# EAGLE board Dash_PCB (EAGLE 8.7.0)
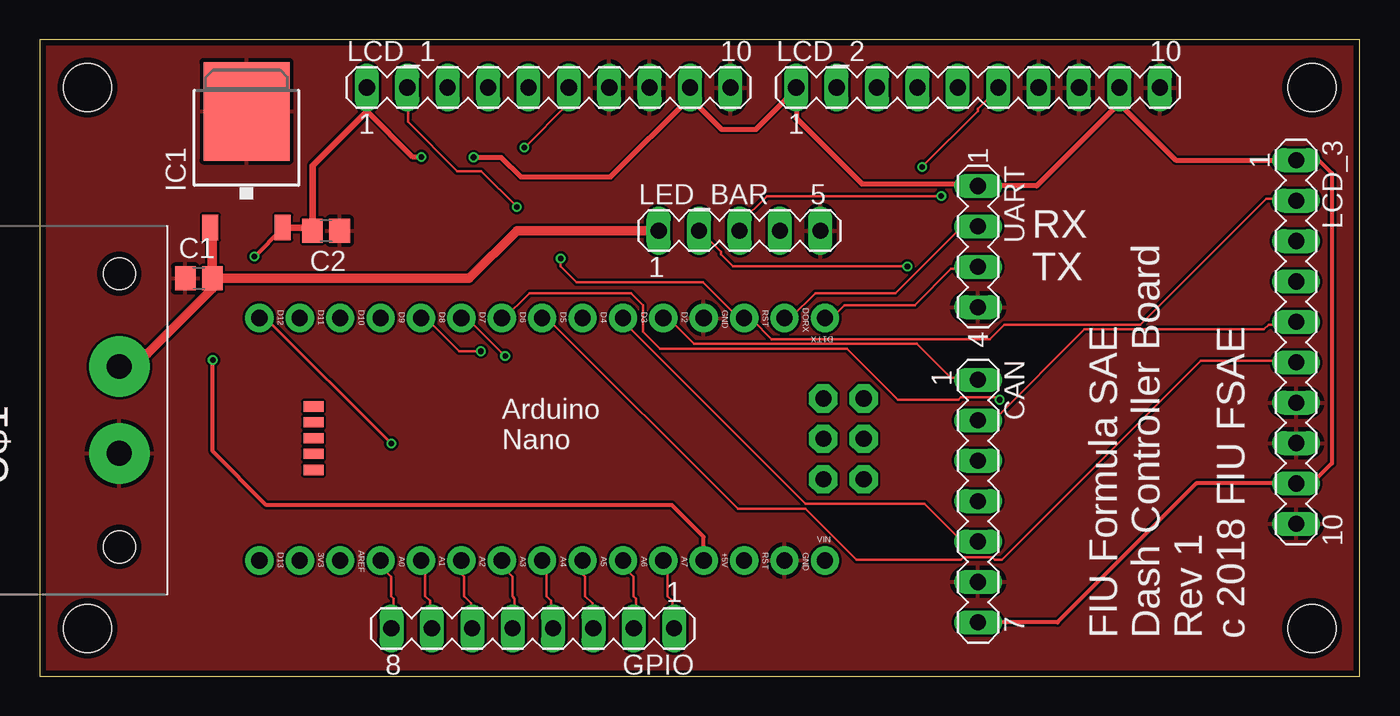
[diagram p0: board, top side]
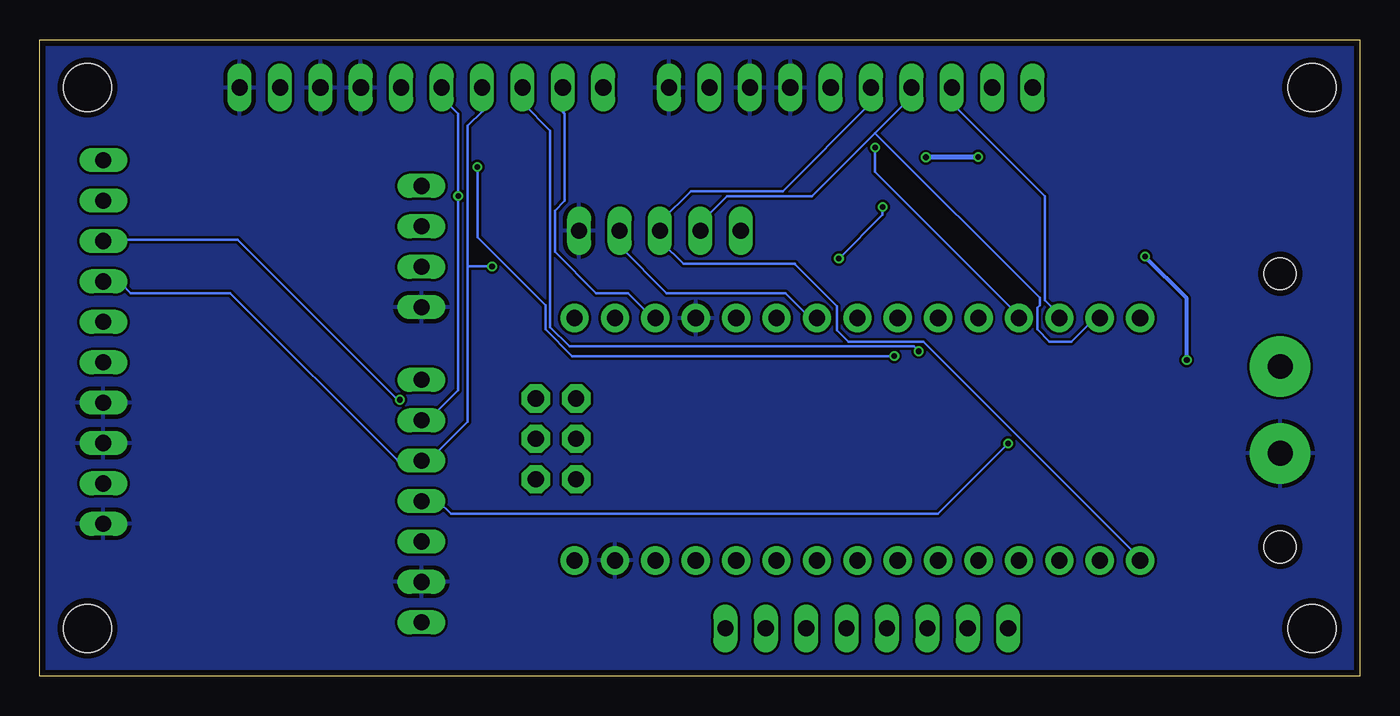
[diagram p1: board, bottom side, seen from below]

Size 83 x 40 mm. Coordinates in mm from the lower left corner, seen from the top.
Outline: 0,0 83,0 83,40 0,40 0,0
Copper layers (1*16): Top 0.035559375mm / dielectric 1.6mm / Bottom 0.035559375mm
Design rules "oshpark-2layer": minimum track width 6mil, minimum drill 10mil, track to track 6mil, track to pad 6mil, pad to pad 6mil, via to via 6mil, smd to smd 6mil, copper to edge 15mil, drill to drill 6mil, minimum pad ring 5mil, minimum via ring 5mil, stop-mask expansion 2.5mil, vias tented up to drill 0mil, thermal gap 10mil
Holes 3 mm at 3,37 3,3 80,3 80,37

## Footprints (pad centres in the part's own frame; a part is rotated, then mirrored left to right if it is on the bottom)
C2012 = smd 1.3 x 1.5: 1 -0.85,0; 2 0.85,0
MA07-1 = drill 1.016 long: 1 -7.62,0; 2 -5.08,0; 3 -2.54,0; 4 0,0; 5 2.54,0; 6 5.08,0; 7 7.62,0
MA08-1 = drill 1.016 long: 1 -8.89,0; 2 -6.35,0; 3 -3.81,0; 4 -1.27,0; 5 1.27,0; 6 3.81,0; 7 6.35,0; 8 8.89,0
TO252 = smd 1 x 1.6: 1 -2.28,-4.8; 2 2.28,-4.8 | smd 5.4 x 6.2: 3 0,2.5
MA10-1 = drill 1.016 long: 1 -11.43,0; 2 -8.89,0; 3 -6.35,0; 4 -3.81,0; 5 -1.27,0; 6 1.27,0; 7 3.81,0; 8 6.35,0; 9 8.89,0; 10 11.43,0
MA05-1 = drill 1.016 long: 1 -5.08,0; 2 -2.54,0; 3 0,0; 4 2.54,0; 5 5.08,0
ARDUINO_NANO = smd 1.27 x 0.635: 1 7.214,10.947; 2 7.214,9.957; 3 7.214,8.941; 4 7.214,7.976; 5 7.214,6.96 | drill 1.016 pad 1.778: 3V3 6.35,1.27; 5V 31.75,1.27; A0 11.43,1.27; A1 13.97,1.27; A2 16.51,1.27; A3 19.05,1.27; A4 21.59,1.27; A5 24.13,1.27; A6 26.67,1.27; A7 29.21,1.27; D2 29.21,16.51; D3 26.67,16.51; D4 24.13,16.51; D5 21.59,16.51; D6 19.05,16.51; D7 16.51,16.51; D8 13.97,16.51; D9 11.43,16.51; D10 8.89,16.51; D11 6.35,16.51; D12 3.81,16.51; D13 3.81,1.27; GND 31.75,16.51; GND. 36.83,1.27; REF 8.89,1.27; RST 34.29,16.51; RST. 34.29,1.27; RX1 36.83,16.51; TX1 39.37,16.51; VIN 39.37,1.27 | drill 1.016 pad 1.778 octagon: 5V. 39.268,6.375; GND_ 39.268,11.455; MISO 41.808,6.375; MOSI 39.268,8.915; RESET.. 41.808,11.455; SCK 41.808,8.915
DTF13-2P = drill 1.56 pad 3.81: P$1 0,0; P$2 0,5.46 | hole 2: 0,11.295; 0,-5.875
MA04-1 = drill 1.016 long: 1 -3.81,0; 2 -1.27,0; 3 1.27,0; 4 3.81,0

## Placement (x,y rotation side)
C1  0.33uF  [C2012]  10,25 0 top
C2  0.1uF  [C2012]  18,28 180 top
CAN  [MA07-1]  59,11 270 top
GPIO  [MA08-1]  31,3 180 top
IC1  7805DT  [TO252]  13,33 0 top
LCD_1  [MA10-1]  32,37 0 top
LCD_2  [MA10-1]  59,37 0 top
LCD_3  [MA10-1]  79,21 270 top
LED_BAR  [MA05-1]  44,28 0 top
PCB1  ARDUINO_NANO  [ARDUINO_NANO]  10,6 0 top
U$1  DTF13-2P  [DTF13-2P]  5,14 0 top
UART  [MA04-1]  59,27 270 top

## Library data of the parts
C1 C2 = rcl; SPICEPREFIX: C
CAN GPIO LCD_1-LCD_3 LED_BAR UART = con-lstb; OC_FARNELL: unknown; OC_NEWARK: unknown
IC1 = linear
PCB1 = E14_Arduino_revC
U$1 = DTM-13

## Nets
5V: C2.2 CAN.7 IC1.2 LCD_1.1 LCD_1.9 LCD_2.1 LCD_2.9 LCD_3.1 LCD_3.9 PCB1.5V UART.1
12V: C1.2 IC1.1 LED_BAR.1 U$1.P$2
CS_1: LCD_1.6 PCB1.D9
CS_2: LCD_2.6 PCB1.D7
CS_3: LCD_3.6 PCB1.D5
CS_CAN: CAN.5 PCB1.D3
CS_LED: LED_BAR.4 PCB1.D4
GND: C1.1 C2.1 CAN.6 IC1.3 LCD_1.7 LCD_1.8 LCD_1.10 LCD_2.7 LCD_2.8 LCD_2.10 LCD_3.7 LCD_3.8 LCD_3.10 LED_BAR.5 PCB1.GND PCB1.GND. U$1.P$1 UART.4
INT: CAN.1 PCB1.D2
MISO: CAN.4 PCB1.D12
MOSI: CAN.3 LCD_1.4 LCD_2.4 LCD_3.4 LED_BAR.2 PCB1.D11
N$2: GPIO.1 PCB1.A7
N$3: GPIO.2 PCB1.A6
N$4: GPIO.3 PCB1.A5
N$8: GPIO.4 PCB1.A4
N$9: GPIO.5 PCB1.A3
N$10: GPIO.6 PCB1.A2
N$11: GPIO.7 PCB1.A1
N$12: GPIO.8 PCB1.A0
RESET: LCD_1.2 LCD_2.2 LCD_3.2 PCB1.RST
RS_1: LCD_1.3 PCB1.D10
RS_2: LCD_2.3 PCB1.D8
RS_3: LCD_3.3 PCB1.D6
RX1: PCB1.RX1 UART.2
SCK: CAN.2 LCD_1.5 LCD_2.5 LCD_3.5 LED_BAR.3 PCB1.D13
TX1: PCB1.TX1 UART.3

## Tracks (layer width: path | path; a pad name or v marks a point on that pad's centre or on a via)
5V  (via drill 0.35)
  Top 0.152: 17.07,28.04 C2.2 | 41,36.88 LCD_1.9 41,36.58 | 47.55,36.88 LCD_2.1 47.7,36.88 | 67.82,36.88 LCD_2.9
  Top 0.254: LCD_3.1 80.31,32.43 80.38,32.5 81.25,31.62 81.25,13.38 79.98,12.11 LCD_3.9 72.73,12.11 64,3.38 CAN.7 | PCB1.5V 41.75,8.75 39.75,10.75 14.25,10.75 10.88,14.12 v10.88,19.88 | v13.5,26.38 15.28,28.16 IC1.2
  Top 0.305: 40.89,36.52 LCD_1.9 40.89,36.36 | 40.89,36.36 42.88,34.38 45.04,34.38 47.55,36.88 | LCD_2.1 47.57,35.05 51.69,30.94 58.87,30.94 UART.1 62.69,30.81 67.88,36 67.82,36.06 67.82,36.88 | LCD_2.9 67.89,35.98 71.44,32.43 LCD_3.1 | v24,32.62 23.45,32.62 20.57,35.51 | v27.28,32.61 29.01,32.61 30.25,31.38 35.91,31.38 40.89,36.36
  Top 0.406: LCD_1.1 20.57,35.51 17.15,32.09 C2.2 16.95,28.2 IC1.2
  Bottom 0.254: v10.88,19.88 10.88,23.75 v13.5,26.38
  Bottom 0.305: v24,32.62 23.89,32.61 v27.28,32.61
12V
  Top 0.152: 10.82,25.15 C1.2 | 10.82,28.19 IC1.1
  Top 0.61: U$1.P$2 5.79,20.25 6.75,20.25 10.85,24.35 C1.2 | C1.2 10.85,28.16 10.82,28.19 | C1.2 27,25 30,28 LED_BAR.1
  Bottom 0.152: 38.86,28.04 LED_BAR.1
CS_1  (via drill 0.35)
  Top 0.152: v30.48,33.22 33.22,35.97 33.22,36.88 LCD_1.6
  Bottom 0.152: v30.48,33.22 30.48,31.7 21.34,22.55 PCB1.D9
CS_2  (via drill 0.35)
  Top 0.152: v55.47,32 58.98,35.51 58.98,35.66 60.2,36.88 LCD_2.6 | v29.26,20.12 26.98,22.4 26.52,22.4 PCB1.D7
  Bottom 0.152: v55.47,32 55.47,27.58 51.21,23.32 51.21,21.79 49.53,20.12 v29.26,20.12
CS_3
  Top 0.152: LCD_3.6 78.94,19.81 73,19.81 60.5,7.32 60.05,7.32 59.89,7.47 58.06,7.47 57.91,7.32 51.36,7.32 48.16,10.52 43.89,10.52 32,22.4 31.7,22.4 PCB1.D5
CS_CAN
  Top 0.152: CAN.5 58.98,8.53 57.91,8.53 55.63,10.82 48.16,10.82 36.58,22.4 PCB1.D3
CS_LED
  Bottom 0.152: LED_BAR.4 46.48,27.89 46.48,26.98 43.59,24.08 36.12,24.08 34.59,22.55 34.14,22.55 PCB1.D4
GND
  pour Top: -3,104 170,104 170,-6 168,-8 -3,-8 -8,-3 -8,98
  pour Bottom: -1,102 1,104 163,104 163,-3 159,-7 -5,-7 -8,-4 -8,95
INT
  Top 0.152: CAN.1 58.98,18.75 57.3,18.75 55.17,20.88 41.15,20.88 39.62,22.4 39.32,22.4 PCB1.D2
MISO  (via drill 0.35)
  Top 0.2: v22.1,14.63 14.22,22.51 PCB1.D12
  Bottom 0.152: v22.1,14.63 26.52,10.21 57.15,10.21 57.91,10.97 58.98,10.97 CAN.4
MOSI  (via drill 0.35)
  Top 0.152: v54.56,25.76 43.59,25.76 42.82,26.52 42.82,26.67 41.6,27.89 LED_BAR.2
  Bottom 0.152: 30.48,34.14 34.44,30.18 39.78,30.18 41.45,28.5 41.45,28.04 LED_BAR.2 | 30.48,34.14 28.19,36.42 28.19,36.88 LCD_1.4 | 30.48,34.14 20.12,23.77 20.12,23.32 20.27,23.16 20.27,21.79 19.51,21.03 18.14,21.03 16.76,22.4 16.46,22.4 PCB1.D11 | LCD_3.4 78.94,24.69 77.88,24.69 77.27,24.08 71.02,24.08 60.5,13.56 59.13,13.56 CAN.3 58.98,13.56 58.52,13.56 56.08,16 56.08,25.76 | 56.08,25.76 56.08,34.59 55.17,35.51 55.17,36.88 LCD_2.4 | 56.08,25.76 v54.56,25.76
N$2
  Top 0.152: GPIO.1 39.78,3.05 39.78,4.72 39.47,5.03 39.47,7.01 39.32,7.16 PCB1.A7
N$3
  Top 0.152: GPIO.2 37.49,3.05 37.49,4.88 37.34,5.03 37.34,6.25 36.73,6.86 36.73,7.16 PCB1.A6
N$4
  Top 0.152: GPIO.3 34.75,3.05 34.75,4.57 34.29,5.03 34.29,6.25 34.14,6.4 34.14,7.16 PCB1.A5
N$8
  Top 0.152: GPIO.4 32.16,3.05 32.16,4.72 31.85,5.03 31.85,7.01 31.7,7.16 PCB1.A4
N$9
  Top 0.152: GPIO.5 29.87,3.05 29.87,4.88 29.72,5.03 29.72,6.25 29.11,6.86 29.11,7.16 PCB1.A3
N$10
  Top 0.152: GPIO.6 27.13,3.05 27.13,4.57 26.67,5.03 26.67,6.25 26.52,6.4 26.52,7.16 PCB1.A2
N$11
  Top 0.152: GPIO.7 24.54,3.05 24.54,4.72 24.23,5.03 24.23,7.01 24.08,7.16 PCB1.A1
N$12
  Top 0.152: GPIO.8 22.25,3.05 22.25,4.88 22.1,5.03 22.1,6.25 21.49,6.86 21.49,7.16 PCB1.A0
RESET  (via drill 0.35)
  Top 0.152: LCD_1.2 23.16,36.88 23.16,34.84 26.25,31.75 27.75,31.75 v30,29.5 | LCD_3.2 78.94,30.02 77.11,30.02 69.19,22.1 60.66,22.1 59.74,21.18 46.02,21.18 44.81,22.4 44.35,22.4 PCB1.RST 44.2,22.55 43.89,22.55 41.7,24.75 33.75,24.75 32.75,25.75 v32.75,26.25
  Bottom 0.152: LCD_2.2 50.14,36.88 50.14,35.51 49.99,35.36 49.99,29.87 50.6,29.26 50.6,26.67 48.01,24.08 46.02,24.08 44.35,22.4 PCB1.RST | v32.75,26.25 30,29 v30,29.5
RS_1
  Bottom 0.152: LCD_1.3 25.6,36.88 25.6,35.97 19.81,30.18 19.81,23.62 18.75,22.55 PCB1.D10
RS_2  (via drill 0.35)
  Top 0.152: v27.74,20.42 26.36,20.42 24.38,22.4 24.08,22.4 PCB1.D8
  Bottom 0.152: v27.74,20.42 28.04,20.73 49.68,20.73 50.9,21.95 50.9,34.29 52.58,35.97 52.58,36.88 LCD_2.3
RS_3  (via drill 0.35)
  Top 0.152: v60.35,17.37 60.2,17.37 60.05,17.53 57.91,17.53 57.76,17.37 53.95,17.37 50.75,20.57 39.01,20.57 37.95,21.64 37.95,23.32 37.19,24.08 30.79,24.08 29.11,22.4 PCB1.D6
  Bottom 0.152: v60.35,17.37 60.5,17.37 70.56,27.43 78.94,27.43 LCD_3.3
RX1
  Top 0.152: UART.2 58.98,28.19 57.91,28.19 53.8,24.08 48.77,24.08 47.24,22.55 46.94,22.55 PCB1.RX1
SCK  (via drill 0.35)
  Top 0.152: CAN.2 59.13,16.15 60.05,16.15 65.68,21.79 76.96,21.79 77.27,22.1 78.79,22.1 78.94,22.25 LCD_3.5 | v56.69,30.18 45.72,30.18 44.04,28.5 44.04,28.04 LED_BAR.3
  Bottom 0.152: LCD_2.5 57.61,36.88 57.61,36.27 56.69,35.36 v56.69,30.18 56.69,17.98 58.52,16.15 58.98,16.15 CAN.2 | LCD_1.5 30.79,36.88 30.79,35.97 36.27,30.48 42.06,30.48 43.89,28.65 43.89,28.04 LED_BAR.3 43.89,27.89 43.89,27.28 42.52,25.91 35.51,25.91 35.51,25.88 32.88,23.25 32.88,21.75 32.16,21.03 27.43,21.03 14.33,7.92 14.33,7.77 13.87,7.32 PCB1.D13
TX1
  Top 0.152: UART.3 58.98,25.6 57.3,25.6 55.02,23.32 50.6,23.32 49.84,22.55 49.38,22.55 PCB1.TX1

## Text on the board
tNames: RX / TX | FIU Formula SAE / Dash Controller Board / Rev 1 / c 2018 FIU FSAE